# Altium PCB 电源+控制.pcbdoc
Units mil, origin at the board's own origin, x right, y up, seen from the top; angles counter-clockwise.
Board outline 6490 x 4395 mil, 2 copper layers (Top Layer, Bottom Layer); 87 components, 66 nets, 271 pads, 169 vias.
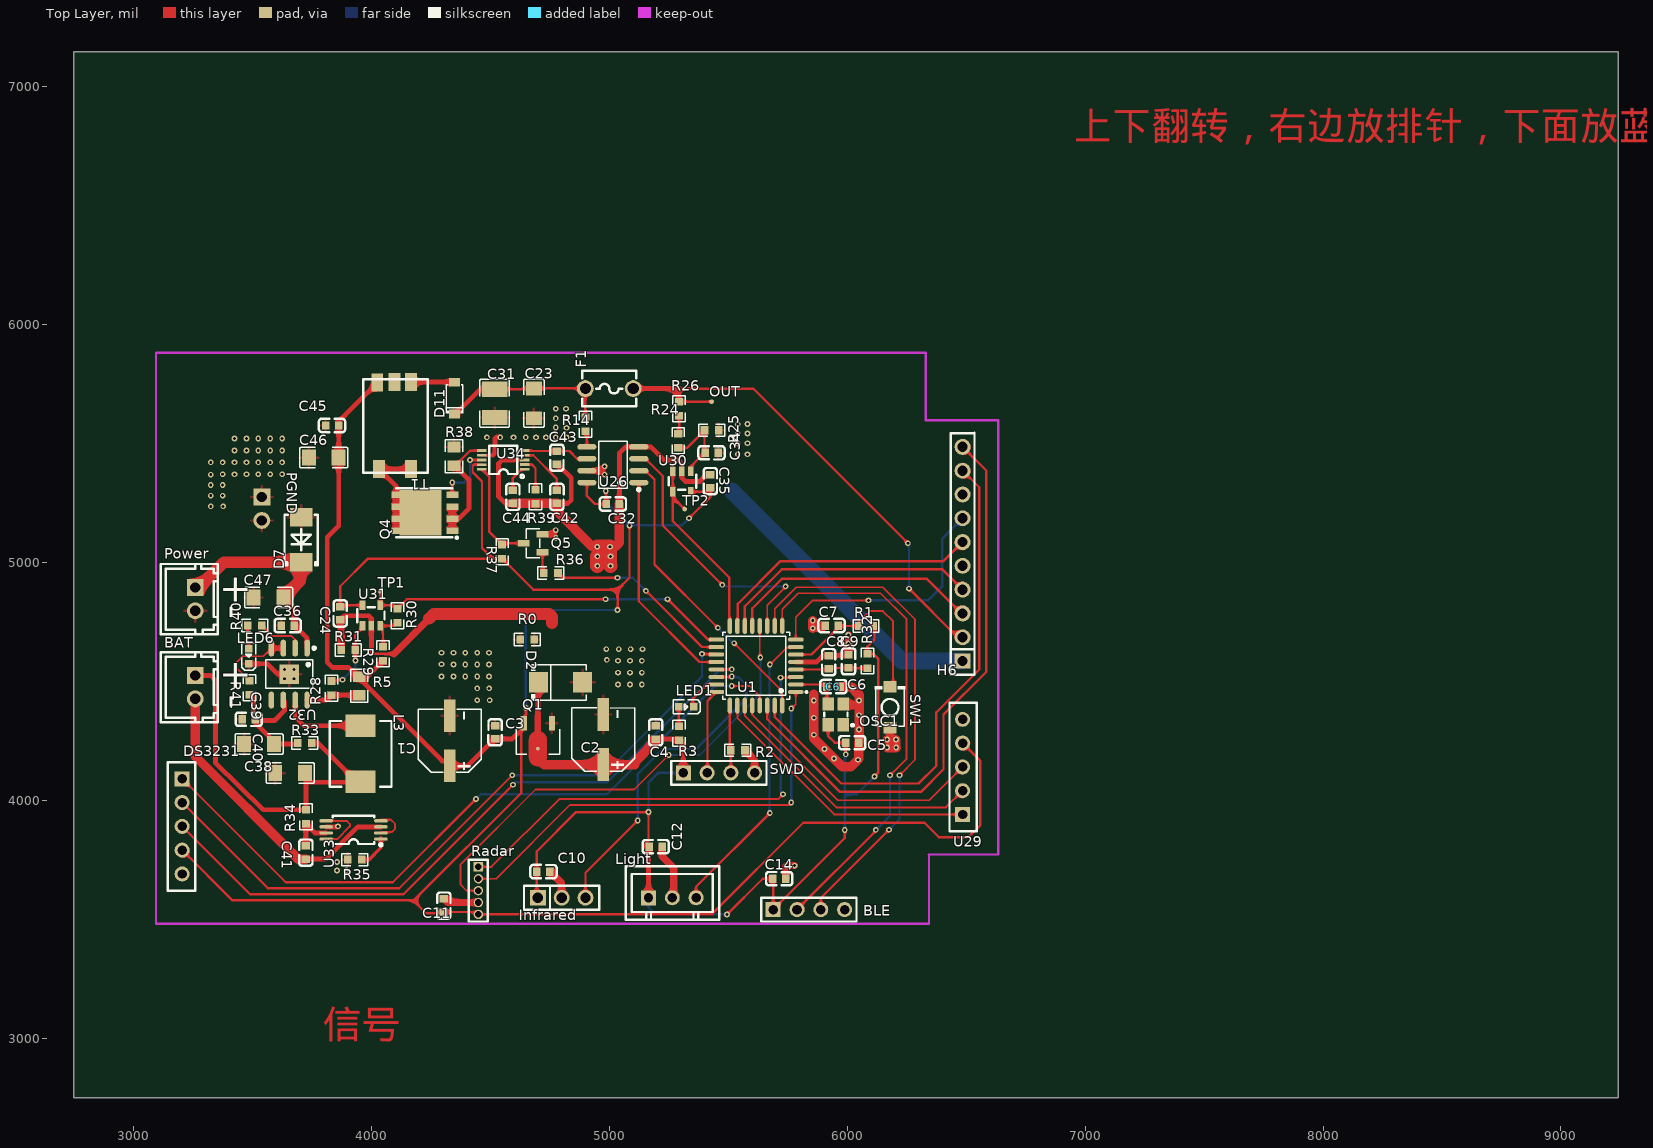
[diagram p0: Top Layer view]
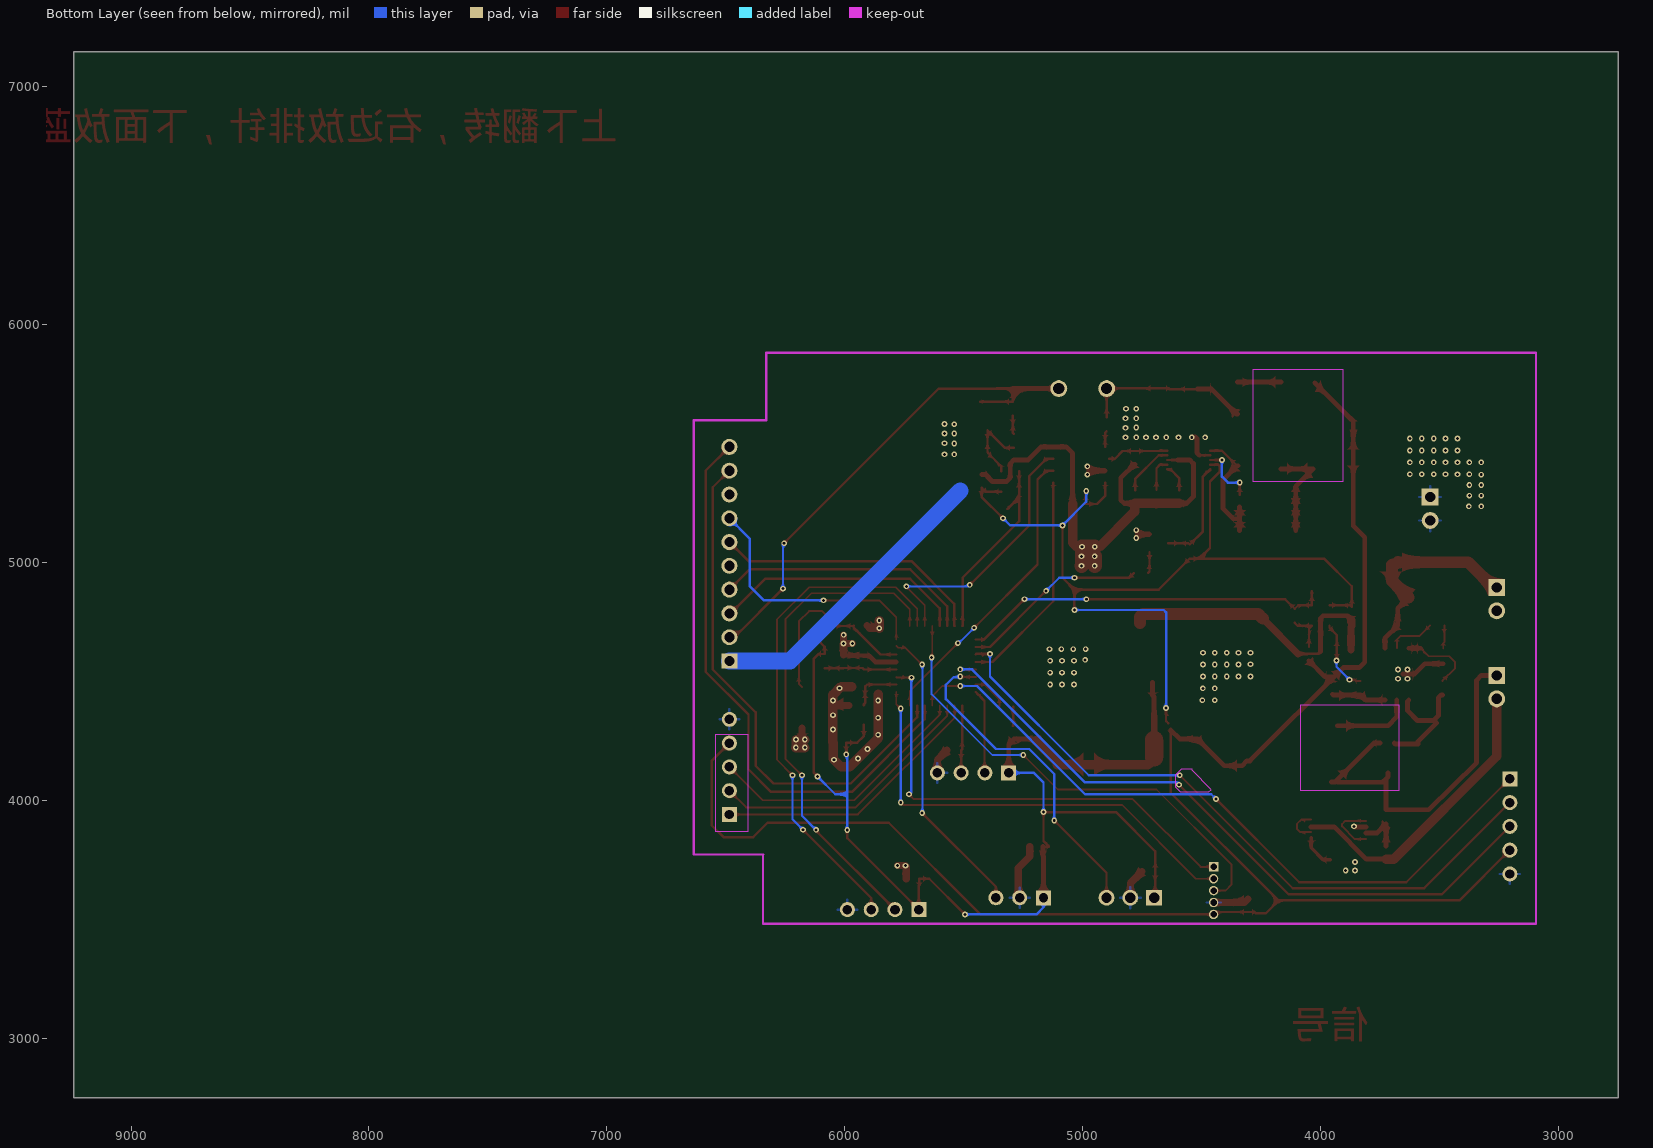
[diagram p1: Bottom Layer view, seen from below]

## Layer stack, top to bottom
Top Layer: signal copper (thickness not stored)
Dielectric: dielectric 12.6, FR-4, Dk 4.8
Bottom Layer: signal copper (thickness not stored)

## Board outline
9240,2750 2750,2750 2750,7145 9240,7145

## Design rules (kind name [scope] priority, off if disabled: settings)
BoardOutlineClearance copperThickness1oz [All] p0: genericclearance=10 ignorepadtopadclearanceinfootprint=FALSE except(0: Arc-SplitContinuation Track-SplitContinuation SMDPad-SplitContinuation THPad-SplitContinuation Via-SplitContinuation Fill-SplitContinuation Poly-SplitContinuation Region-SplitContinuation Text-SplitContinuation; 6: SMDPad-CutoutEdge THPad-CutoutEdge Via-CutoutEdge Fill-CutoutEdge Region-CutoutEdge; 11.8: Track-OutlineEdge SMDPad-OutlineEdge THPad-OutlineEdge Via-OutlineEdge Fill-OutlineEdge Region-OutlineEdge Poly-OutlineEdge Text-OutlineEdge Track-CutoutEdge)
BoardOutlineClearance copperThickness2oz [All] p0: genericclearance=10 ignorepadtopadclearanceinfootprint=FALSE except(0: Arc-SplitContinuation Track-SplitContinuation SMDPad-SplitContinuation THPad-SplitContinuation Via-SplitContinuation Fill-SplitContinuation Poly-SplitContinuation Region-SplitContinuation Text-SplitContinuation; 6: SMDPad-CutoutEdge THPad-CutoutEdge Via-CutoutEdge Fill-CutoutEdge Region-CutoutEdge; 11.8: Track-OutlineEdge SMDPad-OutlineEdge THPad-OutlineEdge Via-OutlineEdge Fill-OutlineEdge Region-OutlineEdge Poly-OutlineEdge Text-OutlineEdge Track-CutoutEdge)
Clearance copperThickness1oz [(InNet('GND') OR InNet('+5V') OR InNet('+3.3V') OR InNet('RADER_RX') OR InNet('OSC_IN') OR InNet('RADER') OR InNet('NRST') OR InNet('LIGHT_ADC') OR InNet('SWITCH6') OR InNet('BLE_TX') OR InNet('BLE_RX') OR InNet('SPI_MOSI') OR InNet('RADER_TX') OR InNet('SWITCH1') OR InNet('SWITCH2') OR InNet('SWITCH4') OR InNet('POWER') OR InNet('SWITCH5') OR InNet('I2C1_SCL') OR InNet('SPI_CS') OR InNet('I2C1_SDA') OR InNet('INFRARED-RAY') OR InNet('LED') OR InNet('SWDIO') OR InNet('SWCLK') OR InNet('CLK') OR InNet('CS') OR InNet('MOSI') OR InNet('DS3231') OR InNet('$1N3438') OR InNet('$3N2640') OR InNet('VBUS') OR InNet('170V') OR InNet('$3N2637') OR InNet('SWITCH3') OR InNet('PGND') OR InNet('SPI_SCK') OR InNet('$1N9499') OR InNet('VIN') OR InNet('$3N23904') OR InNet('$3N11326') OR InNet('$3N12856') OR InNet('VOLTAGE_OUT_ADC') OR InNet('CURRENT_IN_ADC') OR InNet('BATTERY') OR InNet('$3N19739') OR InNet('$3N19736') OR InNet('$3N23384') OR InNet('$3N23544') OR InNet('$3N23862') OR InNet('$3N19545') OR InNet('$3N23743') OR InNet('$3N23755') OR InNet('$3N23799') OR InNet('$3N23149') OR InNet('$3N23156') OR InNet('$3N14774') OR InNet('$3N14639') OR InNet('$3N19740') OR InNet('$3N23532') OR InNet('$3N25392') OR InNet('$3N19735') OR InNet('$3N19737') OR InNet('$3N25796') OR InNet('$3N25397') OR InNet('$3N27137'))] p1: gap=7 ignorepadtopadclearanceinfootprint=FALSE except(4: Track-Track; 6: Track-SMDPad SMDPad-SMDPad Track-THPad SMDPad-THPad THPad-THPad Track-Via SMDPad-Via THPad-Via Via-Via Track-Fill SMDPad-Fill THPad-Fill Via-Fill Fill-Fill SMDPad-Region THPad-Region Via-Region Fill-Region Region-Region Track-Poly SMDPad-Poly THPad-Poly Via-Poly Fill-Poly Poly-Poly Track-Text SMDPad-Text THPad-Text Via-Text Fill-Text Region-Text Poly-Text Text-Text Track-Hole SMDPad-Hole THPad-Hole Via-Hole Fill-Hole Region-Hole Poly-Hole Text-Hole; 11.8: Track-Region Region-Poly Track-Sheet SMDPad-Sheet THPad-Sheet Via-Sheet Fill-Sheet Region-Sheet Poly-Sheet Text-Sheet Sheet-Hole)
Clearance copperThickness2oz [All] p1: gap=7 ignorepadtopadclearanceinfootprint=FALSE except(6: Track-SMDPad SMDPad-SMDPad Track-THPad SMDPad-THPad THPad-THPad Track-Via SMDPad-Via THPad-Via Via-Via Track-Fill SMDPad-Fill THPad-Fill Via-Fill Fill-Fill SMDPad-Region THPad-Region Via-Region Fill-Region Region-Region Track-Poly SMDPad-Poly THPad-Poly Via-Poly Fill-Poly Poly-Poly Track-Text SMDPad-Text THPad-Text Via-Text Fill-Text Region-Text Poly-Text Text-Text Track-Hole SMDPad-Hole THPad-Hole Via-Hole Fill-Hole Region-Hole Poly-Hole Text-Hole; 8: Track-Track; 11.8: Track-Region Region-Poly Track-Sheet SMDPad-Sheet THPad-Sheet Via-Sheet Fill-Sheet Region-Sheet Poly-Sheet Text-Sheet Sheet-Hole)
DiffPairsRouting differentialPair [All] p1: maxuncoupledlength=10 minlimit=5.9843 maxlimit=5.9843 mostfreqgap=5.9843 toplayer_minwidth=5 toplayer_prefwidth=10 toplayer_maxwidth=100 bottomlayer_minwidth=5 bottomlayer_prefwidth=10 bottomlayer_maxwidth=100
PasteMaskExpansion pasteMaskExpansion [All] p1: expansion=0
PlaneConnect innerPlane [All] p1: planeconnectstyle=Relief reliefexpansion=20 reliefentries=4 reliefconductorwidth=10 reliefairgap=10
PolygonConnect copperRegion [All] p1: connectstyle=Relief reliefentries=4 reliefconductorwidth=10 polygonreliefangle="90 Angle" airgapwidth=10
RoutingVias viaSize [All] p1: viastyle="Through Hole" holewidth=12.0078 minholewidth=11.811 maxholewidth=248.0314 width=24.0158 minwidth=19.685 maxwidth=393.7008
SolderMaskExpansion solderMaskExpansion [All] p1: useseparateexpansions=TRUE expansion=2.0079 expansionbottom=2.0079
Width copperThickness1oz [All] p1: maxlimit=100 minlimit=5 preferedwidth=10
Width copperThickness2oz [All] p1: maxlimit=100 minlimit=8 preferedwidth=10

## Components (designator, comment, footprint, x,y, rotation, side; value= is the part's Value field where it differs from the comment)
BAT "ZX-XH2.54-2PZZ" CONN-TH_2P-P2.50_HX25003-2A 3260,4475 r270 top
BLE "排针" SIP-2.54MM-4P-CJT-H8.54 5839.12,3540 r180 top
C1 "RVT220UF10V67RV0037" CAP-SMD_BD6.3-L6.6-W6.6-FD 4330,4250 r90 top
C2 "RVT220UF10V67RV0037" CAP-SMD_BD6.3-L6.6-W6.6-FD 4975,4255.09 r90 top
C3 "CC0603KRX7R9BB104" C0603 4520,4285 r270 top
C4 "CC0603KRX7R9BB104" C0603 5195,4284.79 r270 top
C5 "CC0603KRX7R9BB104" C0603 6021.07,4241.5 r0 top
C6 "CC0603KRX7R9BB104" C0603 5942.31,4477.36 r0 top
C7 "CC0603KRX7R9BB104" C0603 5934.45,4734.1 r0 top
C8 "CC0603KRX7R9BB104" C0603 5921.97,4580 r270 top
C9 "CC0603KRX7R9BB104" C0603 6005.52,4583.44 r270 top
C10 "CC0603KRX7R9BB104" C0603 4723.23,3700 r180 top
C11 "CC0603KRX7R9BB104" C0603 4305,3557.56 r90 top
C12 "CC0603KRX7R9BB104" C0603 5195,3805 r180 top
C14 "CC0603KRX7R9BB104" C0603 5714.31,3670 r0 top
C23 "CC0805KRX7R9BB104" c1206 4683.16,5668.05 r90 top
C24 "0.1u" C0603 3869.27,4785.11 r90 top
C31 "CC0805KRX7R9BB104" c1210 4518.16,5668.05 r90 top
C32 "CC0805KRX7R9BB104" C0603 5015,5245 r180 top
C34 "0.1u" C0603 5430,5460 r0 top
C35 "0.1u" C0603 5424.78,5340.82 r270 top
C36 "CAP_0603" C0603 3648.76,4734.07 r0 top
C38 "CAP_1206" c1206 3658.76,4114.07 r0 top
C39 "CAP_0603" C0603 3485,4340 r0 top
C40 "CAP_1206" c1206 3528.08,4235.93 r0 top
C41 "CAP_0603" C0603 3725,3780 r90 top
C42 "CC0805KRX7R9BB104" C0603 4780,5275 r90 top
C43 "CC0805KRX7R9BB104" C0603 4780,5440 r90 top
C44 "CC0805KRX7R9BB104" C0603 4595,5275 r90 top
C45 "CC0805KRX7R9BB104" C0603 3835,5575 r0 top
C46 "CC0805KRX7R9BB104" c1206 3800,5440 r0 top
C47 "CC0805KRX7R9BB104" c1206 3568.08,4852.05 r0 top
D2 "SMBJ3.3A_C362089" SMB_L4.6-W3.6-LS5.3-RD 4795,4495 r0 top
D7 "SMBJ5.0A_C726811" SMB_L4.4-W3.6-LS5.3-RD 3705,5095 r90 top
D11 "ES1J_C691230" sod-123_l2.7-w1.6-ls3.6-rd 4350,5690 r90 top
DS3231 "2.54mm1*5" 2.54mm1*5 3205,3890.06 r270 top
F1 "JK250-080U" FUSE-TH_L5.8-W3.8-P5.10-D0.8 5000,5730 r0 top
H6 "MH254V-11-10-1196" HDR-TH_10P-P2.54-V-M 6485,5035 r90 top
Infrared "PZ254V-11-03P" HDR-TH_3P-P2.54-V-M 4800,3590 r0 top
L3 "APH0630T1R0M" IND-SMD_L7.0-W6.6 3955,4195 r270 top
LED1 "NCD0603R1_C84263" LED0603-RD_RED 5324.3,4392.7 r180 top
LED6 "NCD0603R1_C84263" LED0603-RD_RED 3485,4605 r90 top
Light "ZX-XH2.54-3PZZ" CONN-TH_3P-P2.54_2501S-3P 5265,3590 r0 top
OSC1 "OT2EL4C4JI-111OLP-8M" OSC-SMD_4P-L3.2-W2.5-BL-1 5952.13,4360.27 r90 top
OUT "Test-Point" Test-Point-0.5mm 5430,5675 r0 top
PGND "ZX-XH2.54-2PZZ" CONN-TH_2P-P2.50_HX25003-2A 3540,5225 r270 top
Power "ZX-XH2.54-2PZZ" CONN-TH_2P-P2.50_HX25003-2A 3260,4845 r270 top
Q1 "AMS1117-3.3V_C5120796" SOT-89-3_L4.5-W2.5-P1.50-LS4.2-BR 4700,4270 r90 top
Q4 "CSD18540Q5B" VSON-CLIP-8_L5.0-W6.0-P1.27-BL 4222.56,5208.05 r90 top
Q5 "MMBT5551_C2145" SOT-23-3_L2.9-W1.3-P1.90-LS2.4-BR 4680,5080 r0 top
R0 "Res_0603" R0603 4655,4675.1 r0 top
R1 "0805W8F1002T5E_C17414" R0603 6079.02,4732.01 r0 top
R2 "0805W8F1002T5E_C17414" R0603 5540.74,4210 r180 top
R3 "0805W8F1002T5E_C17414" R0603 5293.82,4282.01 r90 top
R5 "100mΩ" R0805 3949.27,4480.11 r90 top
R14 "0805W8F1002T5E_C17414" R0603 4900,5580 r90 top
R24 "0805W8F1002T5E_C17414" R0603 5289.78,5510.42 r90 top
R25 "0805W8F1002T5E_C17414" R0603 5430,5555 r180 top
R26 "0805W8F1002T5E_C17414" R0603 5293.56,5645.42 r90 top
R28 "1KΩ" R0603 3832.4,4471.41 r90 top
R29 "10KΩ" R0603 4049.27,4615.11 r90 top
R30 "10KΩ" R0603 4109.27,4775.11 r90 top
R31 "30KΩ" R0603 3902.4,4631.41 r0 top
R32 "0Ω" R0603 6085,4585 r90 top
R33 "Res_0805" R0603 3720,4240 r0 top
R34 "Res_0805" R0603 3725,3930 r90 top
R35 "Res_0805" R0603 3930,3750 r0 top
R36 "0805W8F1002T5E_C17414" R0603 4755,4955 r0 top
R37 "0805W8F1002T5E_C17414" R0603 4550,5045 r270 top
R38 "RL10FTNR160" R0805 4347.16,5444.96 r270 top
R39 "0805W8F1002T5E_C17414" R0603 4690.13,5274.89 r270 top
R40 "Res_0805" R0603 3510,4735 r180 top
R41 "Res_0805" R0603 3488.08,4472.05 r90 top
Radar "FH1.27-01-5PZD" HDR-TH_5P-P1.27-V-M 4450,3620 r270 top
SW1 "TS-1088R-02026" SW-SMD_L3.9-W3.0-P4.45 6180,4390 r90 top
SWD "排针" SIP-2.54MM-4P-CJT-H8.54 5461.08,4115 r180 top
T1 "TTRN-060-054" TTRN-060-054 4100,5570 r180 top
TP1 "Test-Point" Test-Point-0.5mm 4037.31,4878.69 r0 top
TP2 "Test-Point" Test-Point-0.5mm 5316.68,5223.69 r0 top
U1 "STM32G070KBT6" LQFP-32_L7.0-W7.0-P0.80-LS9.0-BL 5616.89,4565 r90 top
U26 "MCP41010T-I/SN" SOIC-8_L4.9-W3.9-P1.27-LS6.0-BL 5015,5410 r90 top
U29 "2.54mm1*5" 2.54mm1*5 6485,4140 r90 top
U30 "LM321MF" SOT-23-5_L2.9-W1.6-P0.95-LS2.8-BL 5305,5340 r180 top
U31 "LM321MF" SOT-23-5_L2.9-W1.6-P0.95-LS2.8-BL 4000.3,4776.15 r0 top
U32 "IP5306-CK" SOP-8_L4.9-W3.9-P1.27-LS6.0-BL-EP2.1 3655,4530 r180 top
U33 "DW03D" TSSOP-8_L4.4-W3.0-P0.65-LS6.4-BL 3925,3875 r90 top
U34 "MAX668EUB+" UMAX-10_L3.0-W3.0-P0.50-LS4.9-BL 4555,5430 r90 top

## Footprints (in the part's own frame and the unit in brackets; to place one, negate y for a bottom-side part, rotate by r counter-clockwise, add the part's x,y. Pads: shape width x height; smd on the part's side, far side on the other; paste and mask are expansions set on the pad)
2.54mm1*5 [mm]
  rect 1.6x1.6 hole 1: 1(-5.08,0)
  round 1.6 hole 1: 2(-2.54,0) 3(0,0) 4(2.54,0) 5(5.08,0)
  silkscreen extent -6.86,-1.52 6.86,1.4
C0603 [mm]
  rect 0.8x0.9 smd: 1(-0.7,0) 2(0.7,0)
  silkscreen extent -1.41,-0.71 1.39,0.72
c1206 [mm]
  rect 1.485x1.728 smd: 1(-1.593,0) 2(1.593,0)
  silkscreen extent -2.56,-1.09 2.56,1.09
c1210 [mm]
  rect 1.635x2.7 smd: 1(-1.517,0) 2(1.517,0)
  silkscreen extent -2.56,-1.58 2.56,1.58
CAP-SMD_BD6.3-L6.6-W6.6-FD [mm]
  rect 3.5x1.2 smd: 1(-2.67,0) 2(2.67,0)
  silkscreen extent -3.38,-3.38 3.38,3.38
CONN-TH_2P-P2.50_HX25003-2A [mm]
  rect 1.8x1.8 hole 1.1: 1(-1.25,0)
  round 1.8 hole 1.1: 2(1.25,0)
  silkscreen extent -3.75,-3.7 3.75,2.41
CONN-TH_3P-P2.54_2501S-3P [mm]
  rect 1.6x1.6 hole 1: 1(-2.54,0)
  round 1.6 hole 1: 2(0,0) 3(2.54,0)
  silkscreen extent -4.98,-2.35 5.02,3.35
FUSE-TH_L5.8-W3.8-P5.10-D0.8 [mm]
  round 1.8 hole 1.2: 1(-2.55,0) 2(2.55,0)
  silkscreen extent -2.9,-1.9 2.9,1.9
HDR-TH_3P-P2.54-V-M [mm]
  rect 1.7x1.7 hole 1.1: 1(-2.54,0)
  round 1.7 hole 1.1: 2(0,0) 3(2.54,0)
  silkscreen extent -4.02,-1.27 4.02,1.27
HDR-TH_5P-P1.27-V-M [mm]
  rect 1x1 hole 0.7: 1(-2.54,0)
  round 1 hole 0.7: 2(-1.27,0) 3(0,0) 4(1.27,0) 5(2.54,0)
  silkscreen extent -3.3,-1.02 3.3,1.02
HDR-TH_10P-P2.54-V-M [mm]
  rect 1.575x1.7 hole 1.1: 1(-11.43,0)
  round 1.7 hole 1.1: 2(-8.89,0) 3(-6.35,0) 4(-3.81,0) 5(-1.27,0) 6(1.27,0) 7(3.81,0) 8(6.35,0) 9(8.89,0) 10(11.43,0)
  silkscreen extent -12.9,-1.27 12.95,1.27
IND-SMD_L7.0-W6.6 [mm]
  rect 2.4x3.2 smd: 1(-3,0) 2(3,0)
  silkscreen extent -3.5,-3.3 3.5,3.3
LED0603-RD_RED [mm]
  rect 0.8x0.8 smd: 1(-0.8,-0.003) 2(0.8,0.003)
  silkscreen extent -1.49,-0.75 1.39,0.76
LQFP-32_L7.0-W7.0-P0.80-LS9.0-BL [mm]
  oval 0.448x1.684 smd: 1(-2.8,-4.242) 2(-2,-4.242) 3(-1.2,-4.242) 4(-0.4,-4.242) 5(0.4,-4.242) 6(1.2,-4.242) 7(2,-4.242) 8(2.8,-4.242) 17(2.8,4.242) 18(2,4.242) 19(1.2,4.242) 20(0.4,4.242) 21(-0.4,4.242) 22(-1.2,4.242) 23(-2,4.242) 24(-2.8,4.242)
  oval 1.684x0.448 smd: 9(4.242,-2.8) 10(4.242,-2) 11(4.242,-1.2) 12(4.242,-0.4) 13(4.242,0.4) 14(4.242,1.2) 15(4.242,2) 16(4.242,2.8) 25(-4.242,2.8) 26(-4.242,2) 27(-4.242,1.2) 28(-4.242,0.4) 29(-4.242,-0.4) 30(-4.242,-1.2) 31(-4.242,-2) 32(-4.242,-2.8)
  silkscreen extent -3.58,-5.48 3.58,3.58
OSC-SMD_4P-L3.2-W2.5-BL-1 [mm]
  rect 1.4x1.2 smd: 1(-1.1,-0.8) 2(1.1,-0.8) 3(1.1,0.8) 4(-1.1,0.8)
  silkscreen extent -1.27,-1.91 0.17,1.25
R0603 [mil]
  rect 31.75x34.02 smd: 1(-29.66,0) 2(29.66,0)
  silkscreen extent -55,-26 55,26
R0805 [mm]
  rect 1.133x1.377 smd: 1(-1,0) 2(1,0)
  silkscreen extent -1.76,-0.92 1.76,0.92
SIP-2.54MM-4P-CJT-H8.54 [mm]
  rect 1.6x1.6 hole 1.02: 1(3.81,0)
  round 1.6 hole 1.02: 2(1.27,0) 3(-1.27,0) 4(-3.81,0)
  silkscreen extent -5.08,-1.27 5.08,1.27
SMB_L4.4-W3.6-LS5.3-RD [mm]
  rect 2x2.4 smd: 1(-2.4,0) 2(2.4,0)
  silkscreen extent -2.76,-1.78 2.67,1.78
SMB_L4.6-W3.6-LS5.3-RD [mil]
  rect 80.61x86.31 smd: 1(-92.94,0) 2(92.94,0)
  silkscreen extent -123,-77 108,77
sod-123_l2.7-w1.6-ls3.6-rd [mm]
  rect 0.95x1.15 smd: 1(-1.692,0) 2(1.692,0)
  silkscreen extent -1.63,-0.94 1.41,0.94
SOIC-8_L4.9-W3.9-P1.27-LS6.0-BL [mm]
  oval 0.588x2.045 smd: 1(-1.905,-2.772) 2(-0.635,-2.772) 3(0.635,-2.772) 4(1.905,-2.772) 5(1.905,2.772) 6(0.635,2.772) 7(-0.635,2.772) 8(-1.905,2.772)
  silkscreen extent -2.8,-2.92 2.53,1.52
SOP-8_L4.9-W3.9-P1.27-LS6.0-BL-EP2.1 [mm]
  oval 0.6x1.8 smd: 1(-1.905,-2.772) 2(-0.635,-2.772) 3(0.635,-2.772) 4(1.905,-2.772) 5(1.905,2.772) 6(0.635,2.772) 7(-0.635,2.772) 8(-1.905,2.772)
  rect 2.1x2.1 smd: 9(0,0)
  silkscreen extent -2.8,-2.92 2.53,1.52
SOT-23-3_L2.9-W1.3-P1.90-LS2.4-BR [mm]
  rect 1.25x0.7 smd: 1(1,-0.95) 2(1,0.95) 3(-1,0)
  silkscreen extent -0.73,-1.53 0.73,1.53
SOT-23-5_L2.9-W1.6-P0.95-LS2.8-BL [mm]
  rect 0.6x1 smd: 1(-0.95,-1.1) 2(0,-1.1) 3(0.95,-1.1) 4(0.95,1.1) 5(-0.95,1.1)
  silkscreen extent -1.52,-0.7 1.4,0.89
SOT-89-3_L4.5-W2.5-P1.50-LS4.2-BR [mm]
  rect 1.575x0.672 smd: 1(1.356,-1.5) 3(1.356,1.5)
  round 0.38 smd: 2(-1.356,0)
  Top Layer region: -2.283,0.95 -0.429,0.95 -0.384,0.949 -0.34,0.946 -0.296,0.94 -0.252,0.933 -0.208,0.924 -0.165,0.912 -0.123,0.899 -0.081,0.884 -0.04,0.866 0,0.847 0.04,0.826 0.078,0.803 0.115,0.779 0.151,0.752 0.185,0.724 0.219,0.695 0.251,0.664 0.281,0.631 0.31,0.597 0.337,0.562 0.362,0.525 0.386,0.488 0.408,0.449 0.428,0.409 0.447,0.33 2.144,0.33 2.144,-0.33 0.447,-0.33 0.428,-0.409 0.408,-0.449 0.386,-0.488 0.362,-0.526 0.337,-0.562 0.31,-0.597 0.281,-0.631 0.251,-0.664 0.219,-0.695 0.185,-0.725 0.151,-0.753 0.115,-0.779 0.078,-0.804 0.04,-0.827 0,-0.848 -0.04,-0.867 -0.081,-0.884 -0.123,-0.899 -0.165,-0.913 -0.208,-0.924 -0.252,-0.934 -0.296,-0.941 -0.34,-0.946 -0.384,-0.949 -0.429,-0.95 -2.283,-0.95 -2.328,-0.949 -2.372,-0.946 -2.416,-0.941 -2.46,-0.934 -2.504,-0.924 -2.547,-0.913 -2.589,-0.899 -2.631,-0.884 -2.672,-0.867 -2.713,-0.848 -2.752,-0.827 -2.79,-0.804 -2.827,-0.779 -2.863,-0.753 -2.898,-0.725 -2.931,-0.695 -2.963,-0.664 -2.993,-0.631 -3.022,-0.597 -3.049,-0.562 -3.075,-0.526 -3.098,-0.488 -3.12,-0.449 -3.141,-0.409 -3.159,-0.369 -3.175,-0.327 -3.189,-0.285 -3.202,-0.242 -3.212,-0.199 -3.22,-0.155 -3.227,-0.111 -3.231,-0.067 -3.233,-0.022 -3.233,0.022 -3.231,0.067 -3.227,0.111 -3.22,0.155 -3.212,0.199 -3.202,0.242 -3.189,0.285 -3.175,0.327 -3.159,0.369 -3.141,0.409 -3.12,0.449 -3.098,0.488 -3.075,0.525 -3.049,0.562 -3.022,0.597 -2.993,0.631 -2.963,0.664 -2.931,0.695 -2.898,0.724 -2.863,0.752 -2.827,0.779 -2.79,0.803 -2.752,0.826 -2.713,0.847 -2.672,0.866 -2.631,0.884 -2.589,0.899 -2.547,0.912 -2.504,0.924 -2.46,0.933 -2.416,0.94 -2.372,0.946 -2.328,0.949
  silkscreen extent -1.95,-2.33 0.7,2.33
SW-SMD_L3.9-W3.0-P4.45 [mm]
  rect 1.23x1.36 smd: 1(-2.185,0) 2(2.185,0)
  silkscreen extent -2.03,-1.62 2.25,1.62
Test-Point-0.5mm [mm]
  round 0.5 smd: 1(0,0)
TSSOP-8_L4.4-W3.0-P0.65-LS6.4-BL [mil]
  oval 13.9x57.24 smd: 1(-38.39,-115.24) 2(-12.79,-115.24) 3(12.8,-115.24) 4(38.39,-115.24) 5(38.39,115.24) 6(12.8,115.24) 7(-12.79,115.24) 8(-38.39,115.24)
  silkscreen extent -68,-121 59,87
TTRN-060-054 [mil]
  rect 50x75 smd: 1(75,-185) 2(-66.4,177.55) 3(-66.4,-187.45) 4(68.6,177.55) NC(2.03,-187.45)
  silkscreen extent -136,-200 134,194
UMAX-10_L3.0-W3.0-P0.50-LS4.9-BL [mm]
  rect 0.3x1 smd: 1(-0.999,-2.3) 2(-0.499,-2.3) 3(0.001,-2.3) 4(0.501,-2.3) 5(1.001,-2.3) 6(0.999,2.3) 7(0.499,2.3) 8(-0.001,2.3) 9(-0.501,2.3) 10(-1.001,2.3)
  silkscreen extent -1.93,-2.18 1.5,1.5
VSON-CLIP-8_L5.0-W6.0-P1.27-BL [mm]
  rect 0.7x1.27 smd: 1(-1.904,-3) 2(-0.636,-3) 3(0.636,-3) 4(1.906,-3)
  rect 0.7x1 smd: 5(1.904,3) 6(0.634,3) 7(-0.636,3) 8(-1.906,3)
  rect 4.9x4.5 smd: 8(-0.001,0.39)
  silkscreen extent -2.75,-3.57 2.6,3

## Via types
v1: diameter 24.02, hole 12.01, Top Layer to Bottom Layer, 165 vias
v2: diameter 24, hole 12, Top Layer to Bottom Layer, 4 vias

## Nets (pads, with @x,y where several pads share a name; then routed paths per layer and width w, separated by ;. In a path a pad name is that pad's centre, name@x,y a point inside that pad or via, vN(x,y) a via of type N, cw(c..) or ccw(c..) an arc to the next point about the centre after c; other vN are vias at no path point)
170V: F1.2 H6.2 OUT.1 R26.2 | length 2118.1
  Top Layer w10: OUT.1 5293.64,5675 R26.2 5294.4,5675.92 5294.4,5730 5605,5730 v1(6255,5080) ; v1(6260,4889.12) 6464.12,4685 H6.2
  Top Layer w20: F1.2 5294.4,5730
  Bottom Layer w10: v1(6255,5080) 6260,5075 v1(6260,4889.12)
$1N3438: LED1.2 R3.2 | length 81.3
  Top Layer w10: LED1.2 5292.83,4312.67 R3.2
$1N9499: C8.2 C9.2 R32.1 U1.4 | length 304.1
  Top Layer w10: U1.4 5918.78,4549.25 C8.2 5925.42,4555.88 C9.2 6006.06,4555.34 R32.1
$3N2637: C23.2 C31.2 D11.1 F1.1 R14.2 | length 714.9
  Top Layer w10: C31.2 4636.19,5727.79 4639.15,5730.75 C23.2 4853.42,5730.75 4854.17,5730 F1.1 4899.6,5610.06 R14.2
  Top Layer w20: D11.1 4353.94,5623.37 4458.35,5727.79 C31.2
$3N2640: R14.1 U26.5 | length 67.8
  Top Layer w10: R14.1 4905.85,5544.49 U26.5
$3N11326: R24.2 R26.1 | length 77.2
  Top Layer w10: R24.2 5293.56,5543.86 R26.1
$3N12856: C34.1 R24.1 R25.2 U30.1 | length 336.5
  Top Layer w10: R24.1 5327.23,5480.76 R25.2@5400.34,5553.87 ; U30.1 5342.4,5402.99 5397.44,5458.03 5397.44,5460 5400.34,5462.9 R25.2@5400.34,5553.87 ; R25.2 R25.2@5400.34,5553.87
$3N14639: R29.2 R30.1 U31.3 | length 169.7
  Top Layer w10: R29.2 4049.27,4721.27 U31.3 4096.66,4732.84 R30.1
$3N14774: R28.2 R31.2 U31.1 | length 313.5
  Top Layer w10: R28.2 3852.4,4501.07 3857.4,4506.07 v1(3879.1,4506.07) ; v1@3932.06,4585 R31.2 3932.06,4694.13 3962.9,4724.97 U31.1
  Bottom Layer w10: v1(3879.1,4506.07) 3933.7,4560.67 v1(3933.7,4587.55)
$3N19545: L3.1 U32.7 | length 336.1
  Top Layer w20: U32.7 3680,4350 3716.89,4313.11 L3.1@3930,4313.11
$3N19735: U33.2 U33.4 | length 153.6
  Top Layer w8: U33.2@4040.24,3867.21 4041.59,3865.86 4085.86,3865.86 4100,3880 4100,3900 4081.61,3918.39 U33.4@4040.24,3918.39
$3N19736: BAT.2 C41.1 U33.3 | length 1256.3
  Top Layer w20: C41.1 3807.44,3752.44 3942.8,3887.8 U33.3
  Top Layer w40: BAT.2 3260,4185 3692.56,3752.44 C41.1
$3N19737: U33.5 U33.8 | length 238.1
  Top Layer w8: U33.8 3856.61,3836.61 3910,3890 3910,3900 3896.61,3913.39 U33.5
$3N19739: C41.2 R34.1 U33.7 | length 193.3
  Top Layer w20: C41.2 R34.1 3763.13,3862.21 U33.7
$3N19740: R35.2 U33.1 | length 137.8
  Top Layer w15: R35.2 3990,3750 4040.24,3800.24 ; 4040.24,3805.24 U33.1@4040.24,3841.61
$3N23149: Q5.1 R36.1 | length 90.1
  Top Layer w10: Q5.1 4719.37,4960.97 R36.1
$3N23156: Q5.3 R37.1 U34.10 | length 444.2
  Top Layer w10: U34.10 4495,5360.05 4495,5129.66 R37.1 4555.34,5080 Q5.3
$3N23384: C42.2 U34.4 | length 223.2
  Top Layer w10: U34.4 4680.28,5449.72 4780,5350 C42.2
$3N23532: R39.1 U34.2 | length 141.6
  Top Layer w10: U34.2 4675.23,5410.34 4690.13,5395.45 R39.1
$3N23544: C44.2 U34.1 | length 117.1
  Top Layer w10: C44.2 4595,5353.89 4631.77,5390.66 U34.1
$3N23743: Q4.1 Q4.2 Q4.3 R38.2 U34.6 | length 535
  Top Layer w10: R38.2@4351.97,5405.59 4415.72,5469.34 U34.6
  Top Layer w20: Q4.1 Q4.2 ; Q4.3 Q4.2 ; R38.2 4351.97,5405.59 4410,5347.56 4410,5225 4368.01,5183.01 Q4.2
$3N23755: Q4.4 U34.8 | length 257
  Top Layer w10: v1(4340,5335) 4340.67,5334.33 Q4.4 ; v1(4415,5430) U34.8
  Bottom Layer w10: v1(4340,5335) 4390,5335 4415,5360 v1(4415,5430)
$3N23799: Q4.5 Q4.6 Q4.7 Q4.8 T1.2 T1.4 | length 424.7
  Top Layer w20: Q4.8@4104.45,5133.01 Q4.7 Q4.6 Q4.5 4104.45,5319.4 T1.4 T1.2
$3N23862: D11.2 T1.3 | length 183.9
  Top Layer w20: T1.3 4349.18,5757.45 D11.2
$3N23904: C43.2 U26.6 U34.5 | length 257.1
  Top Layer w10: U34.5 4675.23,5469.4 4677.07,5467.56 C43.2 4832.44,5467.56 4865,5435 U26.6@4888.41,5435
$3N25392: R40.1 U32.2 | length 201
  Top Layer w8: R40.1 3584.66,4690 3665,4690 3680,4675 U32.2
$3N25397: LED6.2 R40.2 | length 100.4
  Top Layer w8: R40.2 3480.34,4664.75 3484.86,4660.23 LED6.2
$3N25796: C39.2 C40.2 R33.1 R41.1 U32.6 | length 522.5
  Top Layer w20: R41.1 3493.08,4442.39 3505,4430.47 3505,4355 3525,4335 3594.45,4335 3635,4375.55 3635,4415.85 U32.6 ; C39.2@3512.56,4325 3590.78,4246.78 C40.2 3686.27,4235.93 R33.1
$3N27137: R41.2 U32.3 U32.4 | length 319.8
  Top Layer w8: R41.2 3435,4554.79 3435,4580 3460,4605 3545.85,4605 U32.4
  Top Layer w20: U32.4 U32.3
+3.3V: BLE.1 C2.1 C4.2 C5.1 C10.2 C12.2 C14.1 D2.1 Infrared.1 Light.1 OSC1.4 Q1.2 R1.2 R3.1 R32.2 SWD.1 | length 5097.7
  Top Layer w10: Infrared.1 4695.67,3594.33 C10.2 4695,3700.67 4695,3785 4860,3950 v1(5165,3950) 5165,3828.31 5141.69,3805 C12.2 ; v1(5495,3520) 5645,3670 C14.1 5686.76,3642.28 5689.12,3639.92 BLE.1 5990,3840.88 v1(5990,3875) ; OSC1.4 5920,4316.33 5920,4270 5948.5,4241.5 C5.1 5993.68,4241.33 v1(5993.68,4192.71) ; R1.2 6115,4725.69 6115,4675 6085,4645 R32.2 6110.34,4614.66 6130,4595 6130,4115 v1(6115,4100)
  Top Layer w20: Q1.2 4700.01,4434.79 4707.06,4441.84 D2.1@4707.06,4495 ; Light.1 5165,3764.84 5167.44,3767.28 C12.2 ; C4.2 5288.95,4257.23 R3.1 5311.08,4235.1 SWD.1
  Top Layer w40: 4684.6,4192.19 4726.81,4149.97 C2.1 5096.89,4149.97 ; 5106.89,4149.97 5096.89,4149.97 ; C4.2@5196.92,4250 5096.89,4149.97
  Bottom Layer w10: Light.1 5165,3550 5195,3520 v1(5495,3520) ; v1(5165,3950) 5165,4075 5205,4115 SWD.1 ; v1(5990,3875) 5990,4025 ; v1(5993.68,4192.71) 5990,4189.02 5990,4025 ; v1(6115,4100) 6040,4025 5990,4025
+5V: C1.1 C3.2 C11.1 C24.2 C32.2 C35.2 C45.2 C46.2 DS3231.4 Q1.3 R5.2 R29.1 R37.2 Radar.5 T1.1 U26.8 U29.4 U30.5 U31.5 U34.9 | length 11469.4
  Top Layer w10: DS3231.4 3415.06,3580 4175,3580 ; U31.5 3876.06,4819.46 C24.2 3869.27,4899.27 3985.34,5015.34 4509.66,5015.34 ; U34.9 4430.29,5410.29 4425,5405 4425,5380 4465,5340 4465,5060 4509.66,5015.34 ; Q1.3@4630,4294.67 4630,4030 4180,3580 4175,3580 ; Q1.3 4650,4332.45 v1(4650,4387.67) ; U26.8 4905.85,5279.15 4940,5245 C32.2 4987.44,5297.56 v1(4985,5300) ; v1(5035,4799.43) 5035,4885 ; v1(5085,5155) 5085,4935 5035,4885 ; v1(5335,5185) 5425,5275 5425,5311.37 C35.2@5422.88,5311.37 ; U30.5 5408.2,5296.69 C35.2@5422.88,5311.37 ; C35.2 C35.2@5422.88,5311.37 ; U29.4 6560,4165 6560,3895 6510,3845 6385,3845 6325,3905 5815,3905 5430,3520 Radar.5 4440,3530 C11.1 4277.28,3530 4272.28,3525 4230,3525 4175,3580 ; 4509.66,5015.34 R37.2 4680.34,4885 5035,4885
  Top Layer w19: R5.2 3983.3,4519.48 R29.1
  Top Layer w20: T1.1 3862.7,5592.7 C46.2 3862.7,5152.7 3815,5105 3815,4580 3837.36,4557.64 3904.37,4557.64 4297.14,4164.88 4310,4164.88 C1.1 4405.47,4144.88 4518.03,4257.44 C3.2 4592.77,4257.44 Q1.3@4630,4294.67
  Bottom Layer w10: v1(4650,4387.67) 4649.43,4388.25 4649.43,4789.43 4659.43,4799.43 v1(5035,4799.43) ; v1(4985,5300) 4985,5255 v1(5085,5155) 5305,5155 v1(5335,5185)
BATTERY: BAT.1 C38.2 L3.2 R33.2 R34.2 | length 1544.1
  Top Layer w20: BAT.1 3325,4524.21 3345,4504.21 3345,4157.42 3546.11,3959.66 R34.2 C38.2@3725,4090.53 ; C38.2@3716.47,4114.07 3716.47,4099.07 C38.2@3725,4090.53 ; R33.2 3776.14,4240 3939.25,4076.89 L3.2 ; L3.2@3930,4076.89 3928.11,4075 3740.53,4075 C38.2@3725,4090.53
BLE_RX: BLE.3 U1.10 | length 2139.2
  Top Layer w8: U1.10 5695.63,4804.37 5786.27,4895 6150,4895 6285,4760 6285,4170 v1(6220,4105)
  Top Layer w10: BLE.3 5889.12,3589.12 v1(6175.85,3875.85)
  Bottom Layer w10: v1(6175.85,3875.85) 6220,3920 v1(6220,4105)
BLE_TX: BLE.2 U1.9 | length 2077.6
  Top Layer w8: U1.9 5727.13,4802.13 5795,4870 6140,4870 6250,4760 6250,4175 v1(6180,4105)
  Top Layer w10: BLE.2 6120.42,3871.31 v1(6120.42,3875.42)
  Bottom Layer w10: v1(6120.42,3875.42) 6180,3935 v1(6180,4105)
CLK: U1.28 U29.3 | length 1130
  Top Layer w8: 5600.18,4359.84 5960.03,4000 6345,4000 U29.3 ; 5601.14,4359.84 U1.28
CS: U1.27 U29.2 | length 1146.6
  Top Layer w8: U1.27 5569.65,4355.35 5955,3970 6415,3970 U29.2
CURRENT_IN_ADC: R30.2 TP1.1 U1.17 U31.4 | length 1564.6
  Top Layer w10: TP1.1 4037.31,4819.85 U31.4 4094.58,4819.46 R30.2 4149.27,4844.77 v1(4984.77,4844.77) ; v1(5245,4845) 5414.76,4675.24 U1.17
  Bottom Layer w10: v1(4984.77,4844.77) 5244.77,4844.77 v1(5245,4845)
DS3231: DS3231.1 U1.29 | length 3006.6
  Top Layer w8: v1(5515,4480) 5590,4480 5632.64,4437.36 U1.29
  Top Layer w10: DS3231.1 3640.06,3655 4090,3655 v1(4440,4005)
  Bottom Layer w10: v1(4440,4005) 4460,4025 4990,4025 5445,4480 v1(5515,4480)
GND: BLE.4 C2.2 C4.1 C5.2 C6.2 C7.1 C8.1 C9.1 C10.1 C11.2 C12.1 C14.2 C24.1 C32.1 C35.1 C42.1 C43.1 C44.1 D2.2 DS3231.5 Infrared.2 Light.2 OSC1.2 Q1.1 R0.2 R2.1 R31.1 R39.2 Radar.4 SW1.1 SWD.4 U1.5 U26.4 U29.5 U30.2 U31.2 U34.3 | length 5621
  Top Layer w10: 4000.3,4624.7 4010,4615 4095,4615 ; 4600,5430 U34.3@4645.52,5430
  Top Layer w20: C24.1 3886.72,4775 3990,4775 4000.3,4764.7 U31.2 4000.3,4624.7 ; C44.1 4562.56,5247.44 4535,5275 4535,5415 4550,5430 4600,5430 ; C42.1 4781.97,5247.44 4825.86,5247.44 4840,5261.58 4840,5354.41 4781.97,5412.44 C43.1 ; C32.1 5042.56,5457.56 5070,5485 U26.4 5175,5485 5230,5430 5290,5430 5305,5415 U30.2 5305,5355 5320,5340 5380,5340 5408.38,5368.38 C35.1 ; U1.5 5870.75,4580.75 5897.56,4607.56 C8.1 C9.1@6005.55,4609.03
  Top Layer w30: C24.1 3869.27,4731.8 3872.74,4728.33 R31.1 ; 4095,4615 4242.88,4762.88 ; C11.2 4320.12,3570 Radar.4 ; C10.1 4800,3650.79 Infrared.2 ; C12.1 5222.56,3763.86 5271.02,3715.4 Light.2@5271.02,3594.34 ; R2.1 5611.08,4169.32 SWD.4 ; C14.2 5741.88,3721.88 v1(5745,3725) v1(5779.25,3725) ; v1(5855,4722.59) 5895.38,4722.59 C7.1 ; v1(5968.15,4658.87) v1@6005.52,4658.87 ; OSC1.2@5983.63,4398.31 6050,4398.31 ; v1(6005,4695) 6005.52,4694.48 v1@6005.52,4658.87 ; C9.1 v1@6005.52,4658.87 ; v1(6005.74,4658.87) v1@6005.52,4658.87 ; v1(6167.85,4255) 6180,4267.15 SW1.1
  Top Layer w40: C44.1 4687.92,5247.44 R39.2 4692.33,5247.44 C42.1 ; C42.1@4781.97,5247.44 4781.97,5213.03 4930,5065 v1(4949.37,5065) 4950,5064.37 v1(4950,5025) ; v1(5003.55,5065) 5025,5065 5042.56,5082.56 C32.1 ; v1(5855,4722.59) v1(5855,4755) ; 5860,4445 v1(5860,4419.36) v1(5860,4346.52) v1(5860,4275) 5860,4260 v1(5905,4215) v1(5945,4175) 5980,4140 6015,4140 v1(6045,4170) 6048.63,4173.63 C5.2 6050,4242.87 v1(6050,4296.82) v1(6050,4357.66) 6050,4398.31 v1(6050,4419.36) 6050,4442.7 6015.34,4477.36 C6.2 ; v1(6167.85,4221.33) v1(6205.72,4221.33) 6205,4222.06 v1(6205,4255) v1(6167.85,4255)
  Top Layer w50: 4242.88,4762.88 4263.35,4783.35 4746.65,4783.35 4760,4770 4760,4745
  Top Layer w60: v1(4949.37,5065) v1(5003.55,5065) 5003.55,4986.48 v1(5005.03,4985) ; v1(4950,4985) v1(4950,5025)
  other v1: 6022,4470.7 5037,4486.09 5087,4486.09 5137,4486.09 5037,4536.09 5087,4536.09 5137,4536.09 5037,4586.09 5087,4586.09 5137,4586.09 4990,4590 4987.68,4635 5040,4635 5090,4635 5140,4635 5005.03,5025
I2C1_SCL: DS3231.2 U1.19 | length 2858.8
  Top Layer w10: DS3231.2 3565.06,3630 4117.48,3630 v1(4592.48,4105) ; v1(5390,4615) 5447.12,4615 U1.19
  Bottom Layer w10: v1(4592.48,4105) 4975,4105 5390,4520 v1(5390,4615)
I2C1_SDA: DS3231.3 U1.21 | length 2884.9
  Top Layer w10: DS3231.3 3490.06,3605 4135,3605 v1(4595,4065) ; U1.21 5514.25,4549.25 v1(5515,4550)
  Bottom Layer w10: v1(4595,4065) 4605,4075 4990,4075 5465,4550 v1(5515,4550)
INFRARED-RAY: Infrared.3 U1.22 | length 1397.1
  Top Layer w10: Infrared.3 4900,3695 v1(5120,3915) ; U1.22 5512.76,4517.76 v1(5515,4520)
  Bottom Layer w10: v1(5120,3915) 5120,4110 5225,4215 5365,4215 5575,4425 5575,4485 5542.93,4517.07 5517.93,4517.07 v1(5515,4520)
LED: LED1.1 U1.23 | length 159.8
  Top Layer w10: LED1.1 5350,4398.62 5350,4425 5411.26,4486.26 U1.23
LIGHT_ADC: Light.3 U1.7 | length 1254
  Top Layer w8: v1(5675,4570) 5745.74,4640.74 5775.9,4640.74 U1.7@5783.9,4648.74
  Top Layer w10: Light.3 5365,3636.23 v1(5675,3946.23)
  Bottom Layer w10: v1(5675,3946.23) 5673.55,3944.79 5673.55,4568.55 v1(5675,4570)
MOSI: U1.26 U29.1 | length 1166.5
  Top Layer w8: U1.26 5538.15,4346.85 5945,3940 U29.1
NRST: C7.2 R1.1 SW1.2 U1.6 | length 786.9
  Top Layer w8: R1.1 6049.36,4749.36 6095,4795 6150,4795 6193.19,4751.81 6193.19,4489.21 SW1.2
  Top Layer w10: U1.6 5850.15,4612.24 C7.2@5962.01,4724.1 ; C7.2 5964.11,4732.01 R1.1@6044.36,4732.01
OSC_IN: C6.1 OSC1.3 U1.2 | length 220.2
  Top Layer w10: U1.2 5905.85,4486.26 C6.1 5914.75,4409.46 OSC1.3 5920.63,4398.31 OSC1.3@5917.68,4401.26
PGND: C1.2 C3.1 C23.1 C31.1 C34.2 C36.1 C38.1 C39.1 C40.1 C45.1 C46.1 C47.1 D7.2 H6.1 LED6.1 PGND.1 PGND.2 Power.2 Q5.2 R0.1 R25.1 R35.1 R38.1 U26.7 U32.9 U33.6 U34.7 | length 1844.7
  Top Layer w10: U34.7 4509.66,5449.66
  Top Layer w20: LED6.1 3562.14,4573.52 3605.66,4530 U32.9 ; U33.6 3857.8,3887.8 v1(3860,3890) ; 4509.66,5449.66 4520,5460 4520,5520 4527.07,5527.07 4539.72,5527.07 v1(4541.79,5525) ; Q5.2 4757.4,5117.4 ; v1(4775,5101.98) 4759.58,5117.4 4757.4,5117.4 ; v1(4775,5135) 4757.4,5117.4 ; U26.7 4962.36,5385 ; v1(4980.49,5368.39) 4978.97,5368.39 4962.36,5385 ; v1(4980.49,5403.13) 4962.36,5385
  Bottom Layer w70: 5515,5300 6230,4585 H6.1
  other v1: 3855.39,3705 3895,3705 3855.39,3740.67 4445,4420 4497.4,4420 4445,4470 4495.12,4470 4295,4519.69 4345,4520 4395,4520 4445,4520 4495,4520 4345,4570 4395,4570 4445,4570 4495,4570 4295,4571.21 4295,4620 4345,4620 4395,4620 4445,4620 4495,4620 3325,5235 3377.22,5235 3325,5280 3375,5280 3325,5325 3375,5325 3325,5368.23 3425,5369.43 3375,5370.12 3475,5370 3525,5370 3575,5370 3625,5370 3325,5420 3375,5420 3425,5420.03 3475,5420 3525,5420 3575,5420 3625,5420 5540,5453.59 5581.17,5453.59 3425,5470 3475,5470 3525,5470 3575,5470 3625,5470 5540,5499.44 5581.17,5500.3 3425,5520 3475,5520 3525,5520 3575,5520 3625,5520 4485.57,5525 4597.15,5525 4649.05,5525 4692.3,5525 4733.82,5525 4775,5525 4820,5525 5540,5540.96 5581.17,5540.96 4820,5565 4775,5566.03 5540,5580 5581.17,5580.74 4775,5605 4820,5605 4775,5645 4818.59,5645
  other v2: 3635.31,4510.32 3674.68,4510.32 3635.31,4549.69 3674.68,4549.69
POWER: R36.2 U1.18 | length 794.2
  Top Layer w10: R36.2 4804.66,4935 v1(5035,4935) ; v1(5153.74,4880) 5390,4643.74 U1.18
  Bottom Layer w10: v1(5035,4935) 5098.74,4935 v1(5153.74,4880)
RADER: Radar.1 U1.3 | length 1965.5
  Top Layer w8: Radar.1 4505,3720 4790,4005 5710,4005 v1(5730,4025) ; v1(5720,4515) 5781.14,4515 U1.3
  Bottom Layer w10: v1(5720,4515) 5720,4035 v1(5730,4025)
RADER_RX: Radar.2 U1.1 | length 1911.4
  Top Layer w8: Radar.2 4525,3670 4835,3980 5755,3980 v1(5765,3990) ; v1(5765,4385) 5783.9,4403.9 U1.1
  Bottom Layer w10: v1(5765,3990) 5765,4375 v1@5765.86,4375.86
RADER_TX: Radar.3 U1.12 | length 2014.5
  Top Layer w8: Radar.3 4400,3620 4375,3645 4375,3730 4690,4045 5105,4045 v1(5250,4190) ; U1.12 5632.64,4602.36 v1(5635,4600)
  Bottom Layer w8: v1(5250,4190) 5380,4190 5635,4445 v1(5635,4600)
SPI_CS: U1.20 U26.1 | length 930.6
  Top Layer w10: U26.1 5124.15,4835.85 5379.25,4580.75 U1.20
SPI_MOSI: U1.11 U26.3 | length 1159.7
  Top Layer w8: U1.11 5664.13,4819.13 5741.26,4896.26 v1(5741.26,4898.74)
  Top Layer w10: U26.3 5152.83,5435 5225,5362.83 5225,5155 v1(5475,4905)
  Bottom Layer w8: v1(5475,4905) 5481.26,4898.74 v1(5741.26,4898.74)
SPI_SCK: U1.32 U26.2 | length 1255.7
  Top Layer w8: v1(5525,4660) 5727.13,4457.87 U1.32
  Top Layer w10: U26.2 5152.83,5385 5190,5347.83 5190,4991.31 v1(5456.31,4725)
  Bottom Layer w8: v1(5456.31,4725) 5521.31,4660 v1(5525,4660)
SWCLK: R2.2 SWD.3 U1.25 | length 284.8
  Top Layer w10: U1.25 5506.65,4214.42 R2.2 SWD.3
SWDIO: SWD.2 U1.24 | length 350.1
  Top Layer w10: SWD.2@5412.77,4120 5412.77,4417.64 U1.24
SWITCH1: H6.3 U1.13 | length 1069.4
  Top Layer w10: U1.13 5601.14,4806.14 5725,4930 6335,4930 6480,4785 H6.3
SWITCH2: H6.4 U1.14 | length 1097.5
  Top Layer w10: U1.14 5569.65,4814.65 5725,4970 6400,4970 H6.4
SWITCH3: H6.6 U1.15 | length 1146.4
  Top Layer w10: U1.15 5540,4733.86 5540,4825 5720,5005 6405,5005 H6.6
SWITCH4: H6.7 U1.8 | length 1084.3
  Top Layer w8: U1.8 5783.9,4768.9 5855,4840 v1(6090,4840)
  Bottom Layer w10: v1(6090,4840) 6340,4840 6400,4900 6400,5100 H6.7
SWITCH5: H6.9 U1.31 | length 2218.3
  Top Layer w10: U1.31 5695.63,4349.37 5975,4070 6300,4070 6375,4145 6375,4370 6555,4550 6555,5315 H6.9
SWITCH6: H6.10 U1.30 | length 2435
  Top Layer w10: U1.30 5664.13,4340.87 5970,4035 6310,4035 6405,4130 6405,4360 6585,4540 6585,5385 H6.10
VBUS: R5.1 R28.1 U32.8 | length 229.9
  Top Layer w20: U32.8 3810.85,4420.85 3831.75,4441.75 3946.53,4441.75 R5.1@3949.9,4445.11
VIN: C36.2 C47.2 D7.1 Power.1 U32.1 | length 917.5
  Top Layer w20: C47.2 3676.32,4806.5 C36.2 3730,4680.39 U32.1
  Top Layer w50: Power.1 3274.21,4894.21 3380,5000 D7.1@3664.74,5000 ; C47.2 3700,4921.27 3700,4989.74 D7.1@3664.74,5000 ; D7.1@3673.85,4998.85 D7.1@3673.85,4999.37 ; D7.1@3675,5000.52 D7.1@3673.85,4999.37 ; D7.1@3664.74,5000 3673.85,5000 D7.1@3673.85,4999.37
VOLTAGE_OUT_ADC: TP2.1 U1.16 U30.3 U30.4 | length 819.7
  Top Layer w10: U30.3 U30.4 5267.6,5272.77 ; TP2.1 5267.6,5272.77 ; U1.16 5505,4733.66 5505,4935 5267.6,5172.4 5267.6,5272.77
pads on no net: H6.5 H6.8 OSC1.1 T1.NC U32.5

## Polygon pours and split planes (outlines as drawn)
PGND on Top Layer (solid, remove dead copper, pour order 0): 3835.99,5800 3835.99,5525.99 3803.56,5493.56 3803.56,3945 3044.66,3945 3040.27,5255.27 3585,5800
PGND on Bottom Layer (solid, remove dead copper, pour order 12): 4645,4276.26 4038.74,3670 3705,3670 3345,4030 3325,4850 3110.78,4850 3110,5325 3585,5800 3860,5800 3860,5320 4282.95,5320 4293.36,5330.41 4293.36,5580.22 4417.59,5580.22 4417.59,5850.43 5323.27,5853.05 5576.5,5636.65 5576.5,5250 4825.86,5247.44 4819.08,4865 4645,4865
GND on Bottom Layer (solid, remove dead copper, pour order 14): 6141.79,4828.6 6305,4635 6305,4465 6710,4465 6710,3405 3005,3405 3000,3400 3000,3740.46 3385,3740 3510,3620 4090.29,3620 4659.82,4246.41 4659.82,4823.6 4865,4823.6 4865,5044.99 4865,5126.31 5210.15,5126.31 5491.43,4828.6
PGND on Top Layer (solid, remove dead copper, pour order 2): 4110,4415.52 4270.41,4250 4453.52,4250 4487.25,4283.73 4487.25,4285.31 4575.31,4285.31 4605,4385 4649.43,4520.64 4649.43,4732.06 4292.06,4732.06 4110,4550
PGND on Top Layer (solid, remove dead copper, pour order 4): 3815,3730.54 3815,3670 3930,3670 3930,3791.41 3875.87,3791.41
PGND on Top Layer (solid, remove dead copper, pour order 6): 5430,5625 5430,5408.61 5660.75,5408.61 5660.75,5624.25 5660,5625
PGND on Top Layer (solid, remove dead copper, pour order 8): 4463.93,5678.05 4860,5678.05 4860,5497.95 4422.95,5497.95 4369.96,5444.96 4290.45,5444.96 4290.45,5550.45 4295,5555 4340.88,5555
GND on Top Layer (solid, remove dead copper, pour order 10): 4660,4820 4660,4578.86 4766.14,4578.86 4770,4575 4770,4405 4725,4360 4725,4295 4760,4260 5122.57,4260 5148.39,4285.83 5250.83,4285.83 5250.83,4634.17 5115,4770 4960,4770 4940,4790 4940,4820

## Keep-outs
Bottom Layer:
  region: 3905,5810 4285,5810 4285,5340 3905,5340
  region: 6405,4275.57 6545,4275.57 6545,3870 6405,3870
  region: 3670,4400 4084.92,4400 4084.92,4042.2 3670,4042.2
  region: 4540,4130 4586.65,4130 4611.65,4105 4611.65,4056.65 4590,4035 4470,4035 4460,4045 4540,4125
Board Outline Layer:
  lines w10: 6330,5597.13 6635.41,5597.13 ; 6330,5600.14 6330,5880 3095,5880 3095,3480 6343.96,3480 6343.96,3769.63 ; 6343.57,3772.03 6635,3772.03 6635,5590

## Other copper
Top Layer:
  drawing of 336 lines, arcs and shapes, not listed
  text "上下翻转，右边放排针，下面放蓝牙红外线和雷达，中间放芯片，左边放电源" at 6950,6775 h120
  text "信号" at 3795,3000 h120
Bottom Layer:
  region net +3.3V: 5264.58,4110 5264.58,4120 ccw(c5264.58,4138.75) 5279.58,4127.5 5279.58,4102.5 ccw(c5264.58,4091.25)
  region net SWITCH4: 6456.2,5149.13 6449.13,5156.2 6450.89,5158.12 6452.23,5159.94 6453.21,5161.67 6453.85,5163.35 6454.22,5164.99 6454.33,5166.61 6454.25,5168.24 6454.01,5169.89 6453.23,5173.39 6452.34,5177.26 6451.68,5181.69 6451.54,5184.17 6451.59,5186.86 6486.86,5151.59 6484.17,5151.54 6481.69,5151.68 6477.26,5152.34 6473.39,5153.23 6469.89,5154.01 6468.24,5154.25 6466.61,5154.33 6464.99,5154.22 6463.35,5153.85 6461.67,5153.21 6459.94,5152.23 6458.12,5150.89
  region net +3.3V: 5170,3550 5160,3550 ccw(c5151.42,3550) 5152.5,3558.51 5177.5,3558.51 ccw(c5178.58,3550)
  region net I2C1_SCL: 5395,4598.59 5385,4598.59 5384.91,4599.71 5384.66,4600.84 5383.77,4603.07 5382.5,4605.17 5381.05,4606.99 5398.95,4606.99 5397.5,4605.17 5396.23,4603.07 5395.34,4600.84 5395.09,4599.71
  region net I2C1_SDA: 5498.59,4545 5498.59,4555 5499.71,4555.09 5500.84,4555.34 5503.07,4556.23 5505.17,4557.5 5506.99,4558.95 5506.99,4541.05 5505.17,4542.5 5503.07,4543.77 5500.84,4544.66 5499.71,4544.91
  region net SWITCH4: 6106.41,4845 6106.41,4835 6105.29,4834.91 6104.16,4834.66 6101.93,4833.77 6099.83,4832.5 6098.01,4831.05 6098.01,4848.95 6099.83,4847.5 6101.93,4846.23 6104.16,4845.34 6105.29,4845.09
  region net CURRENT_IN_ADC: 5228.76,4839.77 5228.42,4849.77 5229.54,4849.86 5230.68,4850.12 5232.92,4851.03 5235.01,4852.32 5236.83,4853.8 5237.17,4835.9 5235.32,4837.32 5233.23,4838.56 5231.01,4839.44 5229.88,4839.68
  region net SPI_MOSI: 5724.85,4894.74 5724.85,4902.74 5726.16,4902.85 5727.34,4903.17 5728.41,4903.66 5729.4,4904.29 5731.29,4905.87 5733.25,4907.69 5733.25,4889.79 5731.29,4891.61 5729.4,4893.2 5728.41,4893.83 5727.34,4894.32 5726.16,4894.63
  region net SPI_MOSI: 5495.07,4902.74 5489.66,4894.74 5486.42,4894.61 5483.35,4894.25 5477.09,4893.17 5486.66,4907.86 5487.12,4906.65 5487.83,4905.6 5488.75,4904.72 5489.84,4904 5491.06,4903.45 5492.37,4903.05 5493.71,4902.82
  region net SPI_SCK: 5470.75,4716.22 5465.09,4710.57 5464.08,4711.42 5463.03,4712.03 5461.93,4712.44 5460.77,4712.7 5458.32,4712.91 5455.65,4713.01 5468.3,4725.67 5468.4,4723 5468.62,4720.54 5468.87,4719.39 5469.29,4718.29 5469.9,4717.23
  region net SPI_SCK: 5510.23,4665.42 5513.14,4673.83 5514.13,4673.02 5515.24,4672.41 5516.45,4671.98 5517.73,4671.71 5520.41,4671.58 5523.05,4671.85 5513.44,4656.75 5512.88,4659.31 5512.48,4661.46 5512.19,4662.45 5511.76,4663.42 5511.13,4664.4
  region net DS3231: 5498.59,4475 5498.59,4485 5499.71,4485.09 5500.84,4485.34 5503.07,4486.23 5505.17,4487.5 5506.99,4488.95 5506.99,4471.05 5505.17,4472.5 5503.07,4473.77 5500.84,4474.66 5499.71,4474.91
  region net RADER_TX: 5639,4583.59 5631,4583.59 5630.89,4584.9 5630.57,4586.08 5630.09,4587.15 5629.45,4588.15 5627.87,4590.04 5626.05,4591.99 5643.95,4591.99 5642.13,4590.04 5640.55,4588.15 5639.91,4587.15 5639.43,4586.08 5639.11,4584.9
  region net RADER_TX: 5266.41,4194 5266.41,4186 5265.1,4185.89 5263.92,4185.57 5262.85,4185.09 5261.85,4184.45 5259.96,4182.87 5258.01,4181.05 5258.01,4198.95 5259.96,4197.13 5261.85,4195.55 5262.85,4194.91 5263.92,4194.43 5265.1,4194.11
  region net RADER: 5716.46,4031.46 5723.54,4038.54 5724.32,4037.87 5725.12,4037.43 5725.93,4037.17 5726.78,4037.04 5730.67,4036.99 5718.01,4024.33 5717.96,4028.22 5717.83,4029.07 5717.57,4029.88 5717.13,4030.68
  region net RADER_RX: 5760,4006.41 5770,4006.41 5770.09,4005.29 5770.34,4004.16 5771.23,4001.93 5772.5,3999.83 5773.95,3998.01 5756.05,3998.01 5757.5,3999.83 5758.77,4001.93 5759.66,4004.16 5759.91,4005.29
  region net RADER_RX: 5770,4366.59 5760,4366.59 5759.66,4369.17 5758.77,4372.08 5757.51,4374.85 5756.05,4376.99 5773.95,4376.99 5772.49,4374.85 5771.23,4372.08 5770.34,4369.17
  region net RADER: 5725,4498.59 5715,4498.59 5714.91,4499.71 5714.66,4500.84 5713.77,4503.07 5712.5,4505.17 5711.05,4506.99 5728.95,4506.99 5727.5,4505.17 5726.23,4503.07 5725.34,4500.84 5725.09,4499.71
  region net LIGHT_ADC: 5678.55,4552.57 5668.55,4554.73 5668.26,4556.95 5667.49,4559.13 5666.4,4561.21 5665.15,4563.13 5682.92,4560.97 5681.32,4559.26 5679.92,4557.14 5678.93,4554.84 5678.65,4553.69
  region net $3N23755: 4420,5413.59 4410,5413.59 4409.91,5414.71 4409.66,5415.84 4408.77,5418.07 4407.5,5420.17 4406.05,5421.99 4423.95,5421.99 4422.5,5420.17 4421.23,5418.07 4420.34,5415.84 4420.09,5414.71
  region net $3N23755: 4356.41,5340 4356.41,5330 4355.29,5329.91 4354.16,5329.66 4351.93,5328.77 4349.83,5327.5 4348.01,5326.05 4348.01,5343.95 4349.83,5342.5 4351.93,5341.23 4354.16,5340.34 4355.29,5340.09
  region net +5V: 5101.41,5160 5101.41,5150 5100.29,5149.91 5099.16,5149.66 5096.93,5148.77 5094.83,5147.5 5093.01,5146.05 5093.01,5163.95 5094.83,5162.5 5096.93,5161.23 5099.16,5160.34 5100.29,5160.09
  region net +5V: 5069.86,5163.07 5076.93,5170.14 5077.79,5169.41 5078.76,5168.79 5080.98,5167.84 5083.35,5167.26 5085.67,5166.99 5073.01,5154.33 5072.74,5156.65 5072.16,5159.02 5071.21,5161.24 5070.59,5162.21
  region net +5V: 5326.93,5169.86 5319.86,5176.93 5320.59,5177.79 5321.21,5178.76 5322.16,5180.98 5322.74,5183.35 5323.01,5185.67 5335.67,5173.01 5333.35,5172.74 5330.98,5172.16 5328.76,5171.21 5327.79,5170.59
  region net POWER: 5051.41,4940 5051.41,4930 5050.29,4929.91 5049.16,4929.66 5046.93,4928.77 5044.83,4927.5 5043.01,4926.05 5043.01,4943.95 5044.83,4942.5 5046.93,4941.23 5049.16,4940.34 5050.29,4940.09
  region net POWER: 5138.6,4888.07 5145.67,4895.14 5146.53,4894.41 5147.5,4893.79 5149.72,4892.84 5152.09,4892.26 5154.41,4891.99 5141.75,4879.33 5141.48,4881.65 5140.9,4884.02 5139.95,4886.24 5139.33,4887.21
  region net CURRENT_IN_ADC: 5001.18,4849.77 5001.18,4839.77 5000.06,4839.68 4998.93,4839.43 4996.7,4838.54 4994.6,4837.27 4992.78,4835.82 4992.78,4853.72 4994.6,4852.27 4996.7,4851.01 4998.93,4850.11 5000.06,4849.86
  region net INFRARED-RAY: 5533.35,4522.07 5528.99,4512.07 5526.81,4511.84 5524.66,4511.23 5522.57,4510.36 5520.58,4509.37 5524.95,4526.73 5525.64,4525.86 5526.53,4525.02 5528.69,4523.53 5531.07,4522.47 5532.25,4522.18
  region net I2C1_SCL: 4608.89,4110 4608.89,4100 4607.77,4099.91 4606.64,4099.66 4604.41,4098.77 4602.32,4097.5 4600.49,4096.05 4600.49,4113.95 4602.32,4112.5 4604.41,4111.23 4606.64,4110.34 4607.77,4110.09
  region net I2C1_SDA: 4601.46,4078.54 4608.54,4071.46 4607.87,4070.68 4607.43,4069.88 4607.17,4069.07 4607.04,4068.22 4606.99,4064.33 4594.33,4076.99 4598.22,4077.04 4599.07,4077.17 4599.88,4077.43 4600.68,4077.87
  region net +3.3V: 5160,3966.41 5170,3966.41 5170.09,3965.29 5170.34,3964.16 5171.23,3961.93 5172.5,3959.83 5173.95,3958.01 5156.05,3958.01 5157.5,3959.83 5158.77,3961.93 5159.66,3964.16 5159.91,3965.29
  region net +3.3V: 5995,4173.94 5985,4179.43 5984.8,4181.57 5984.28,4183.72 5983.55,4185.83 5982.71,4187.83 5999.75,4182.34 5998.85,4181.69 5997.98,4180.83 5996.46,4178.66 5995.4,4176.24 5995.1,4175.05
  region net 170V: 6265,5066.59 6255,5060.59 6254.91,5061.8 6254.66,5063.06 6254.24,5064.3 6253.68,5065.5 6252.99,5066.61 6252.17,5067.59 6251.23,5068.4 6250.2,5068.99 6266.47,5076.45 6265.92,5074.24 6265.45,5071.56 6265.12,5068.87
  region net +3.3V: 6106.93,4084.86 6099.86,4091.93 6100.59,4092.79 6101.21,4093.76 6102.16,4095.98 6102.74,4098.35 6103.01,4100.67 6115.67,4088.01 6113.35,4087.74 6110.98,4087.16 6108.76,4086.21 6107.79,4085.59
  region net +3.3V: 5985,3891.41 5995,3891.41 5995.09,3890.29 5995.34,3889.16 5996.23,3886.93 5997.5,3884.83 5998.95,3883.01 5981.05,3883.01 5982.5,3884.83 5983.77,3886.93 5984.66,3889.16 5984.91,3890.29
  region net BLE_TX: 6128.49,3890.56 6135.56,3883.49 6134.83,3882.64 6134.21,3881.66 6133.26,3879.45 6132.68,3877.07 6132.41,3874.76 6119.76,3887.41 6122.07,3887.68 6124.45,3888.26 6126.66,3889.21 6127.64,3889.83
  region net BLE_RX: 6183.92,3890.99 6190.99,3883.92 6190.26,3883.07 6189.64,3882.09 6188.69,3879.88 6188.11,3877.5 6187.84,3875.18 6175.18,3887.84 6177.5,3888.11 6179.88,3888.69 6182.09,3889.64 6183.06,3890.26
  region net 170V: 6255,4905.53 6265,4905.53 6265.09,4904.41 6265.34,4903.28 6266.23,4901.04 6267.5,4898.95 6268.95,4897.12 6251.05,4897.12 6252.5,4898.95 6253.77,4901.04 6254.66,4903.28 6254.91,4904.41
  region net BLE_RX: 6225,4088.59 6215,4088.59 6214.91,4089.71 6214.66,4090.84 6213.77,4093.07 6212.5,4095.17 6211.05,4096.99 6228.95,4096.99 6227.5,4095.17 6226.23,4093.07 6225.34,4090.84 6225.09,4089.71
  region net BLE_TX: 6185,4088.59 6175,4088.59 6174.91,4089.71 6174.66,4090.84 6173.77,4093.07 6172.5,4095.17 6171.05,4096.99 6188.95,4096.99 6187.5,4095.17 6186.23,4093.07 6185.34,4090.84 6185.09,4089.71
  region net $3N14774: 3938.7,4571.14 3928.7,4571.14 3928.61,4572.26 3928.36,4573.39 3927.47,4575.63 3926.2,4577.72 3924.75,4579.55 3942.65,4579.55 3941.2,4577.72 3939.93,4575.63 3939.04,4573.39 3938.79,4572.26
  region net $3N14774: 3887.17,4521.21 3894.24,4514.13 3893.51,4513.28 3892.89,4512.3 3891.94,4510.09 3891.36,4507.72 3891.09,4505.4 3878.43,4518.05 3880.75,4518.32 3883.12,4518.91 3885.34,4519.85 3886.31,4520.48
  region net INFRARED-RAY: 5115,3931.41 5125,3931.41 5125.09,3930.29 5125.34,3929.16 5126.23,3926.93 5127.5,3924.83 5128.95,3923.01 5111.05,3923.01 5112.5,3924.83 5113.77,3926.93 5114.66,3929.16 5114.91,3930.29
  region net +3.3V: 5478.59,3515 5478.59,3525 5479.71,3525.09 5480.84,3525.34 5483.07,3526.23 5485.17,3527.5 5486.99,3528.95 5486.99,3511.05 5485.17,3512.5 5483.07,3513.77 5480.84,3514.66 5479.71,3514.91
  region net LIGHT_ADC: 5668.55,3961.51 5678.55,3963.66 5678.65,3962.55 5678.93,3961.39 5679.92,3959.09 5681.32,3956.97 5682.92,3955.26 5665.15,3953.1 5666.4,3955.03 5667.49,3957.1 5668.26,3959.28
  region net +5V: 4990,5283.59 4980,5283.59 4979.91,5284.71 4979.66,5285.84 4978.77,5288.07 4977.5,5290.17 4976.05,5291.99 4993.95,5291.99 4992.5,5290.17 4991.23,5288.07 4990.34,5285.84 4990.09,5284.71
  region net +5V: 4644.43,4403.65 4654.43,4404.5 4654.52,4403.38 4654.78,4402.24 4655.72,4399.98 4657.04,4397.88 4658.56,4396.1 4640.68,4395.25 4642.06,4397.11 4643.26,4399.2 4644.11,4401.41 4644.35,4402.53
  region net +5V: 5018.59,4794.43 5018.59,4804.43 5019.71,4804.52 5020.84,4804.77 5023.07,4805.66 5025.17,4806.93 5026.99,4808.38 5026.99,4790.48 5025.17,4791.93 5023.07,4793.2 5020.84,4794.09 5019.71,4794.34
  region net +3.3V: 6025,4020 ccw(c6025,3970) 5995,4010 5990,4025 5995,4040 ccw(c6025,4080) 6025,4030
  region net DS3231: 4448.07,4020.14 4455.14,4013.07 4454.41,4012.21 4453.79,4011.24 4452.84,4009.02 4452.26,4006.65 4451.99,4004.33 4439.33,4016.99 4441.65,4017.26 4444.02,4017.84 4446.24,4018.79 4447.21,4019.41

## Silkscreen, mask and mechanical layers (free items; w line width, h text height)
Top Silkscreen Layer:
  text "+" at 3360,4835 h120
  text "-" at 3455,4759.5 h120 r90
  text "+" at 3360,4475 h120
  text "C6" at 6000,4465 h45
  text "-" at 3455,4384.5 h120 r90